# EAGLE board PCB (EAGLE 9.7.0)
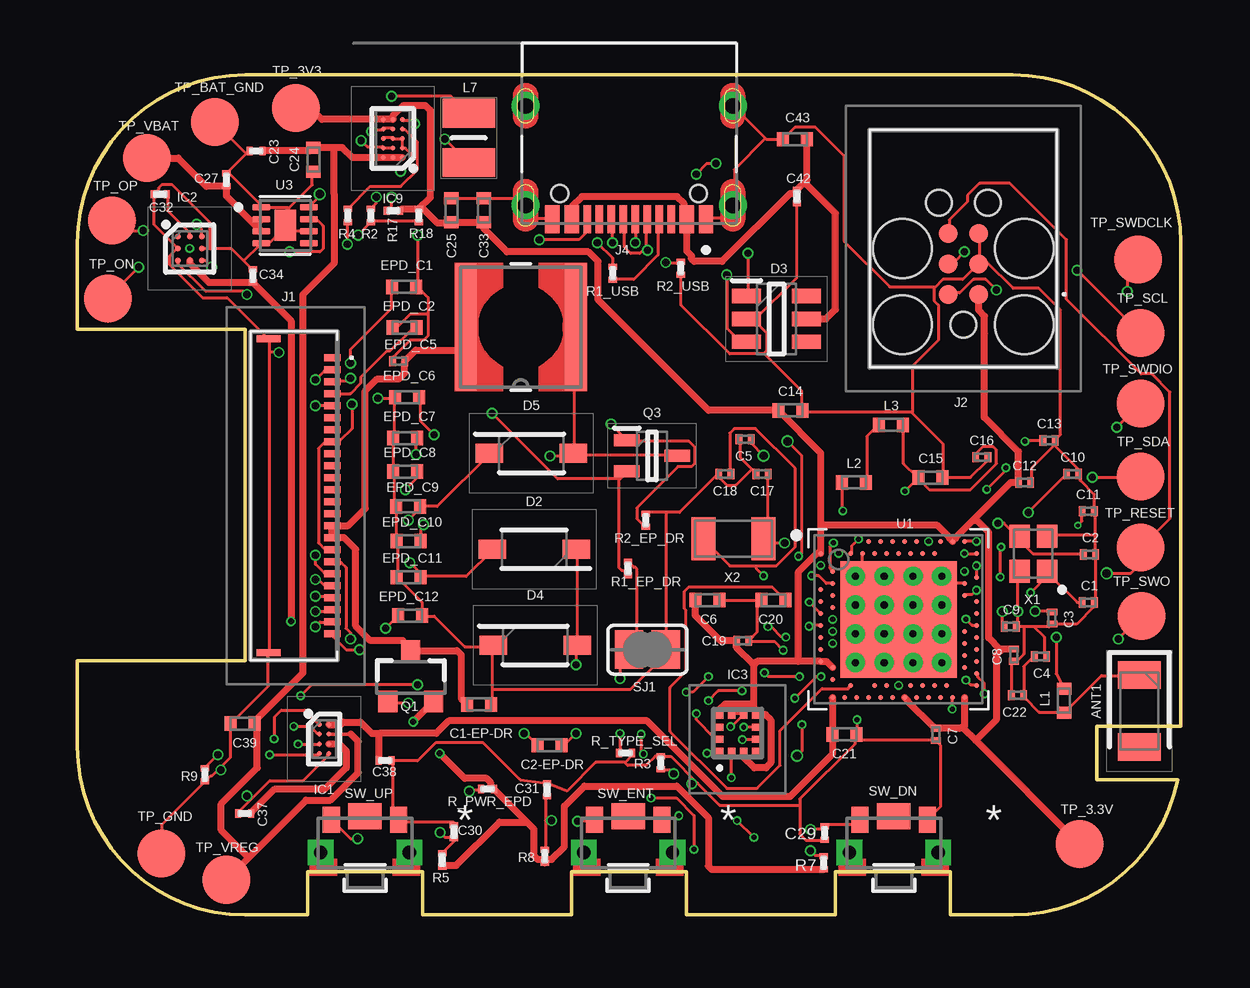
[diagram p0: board, top side]
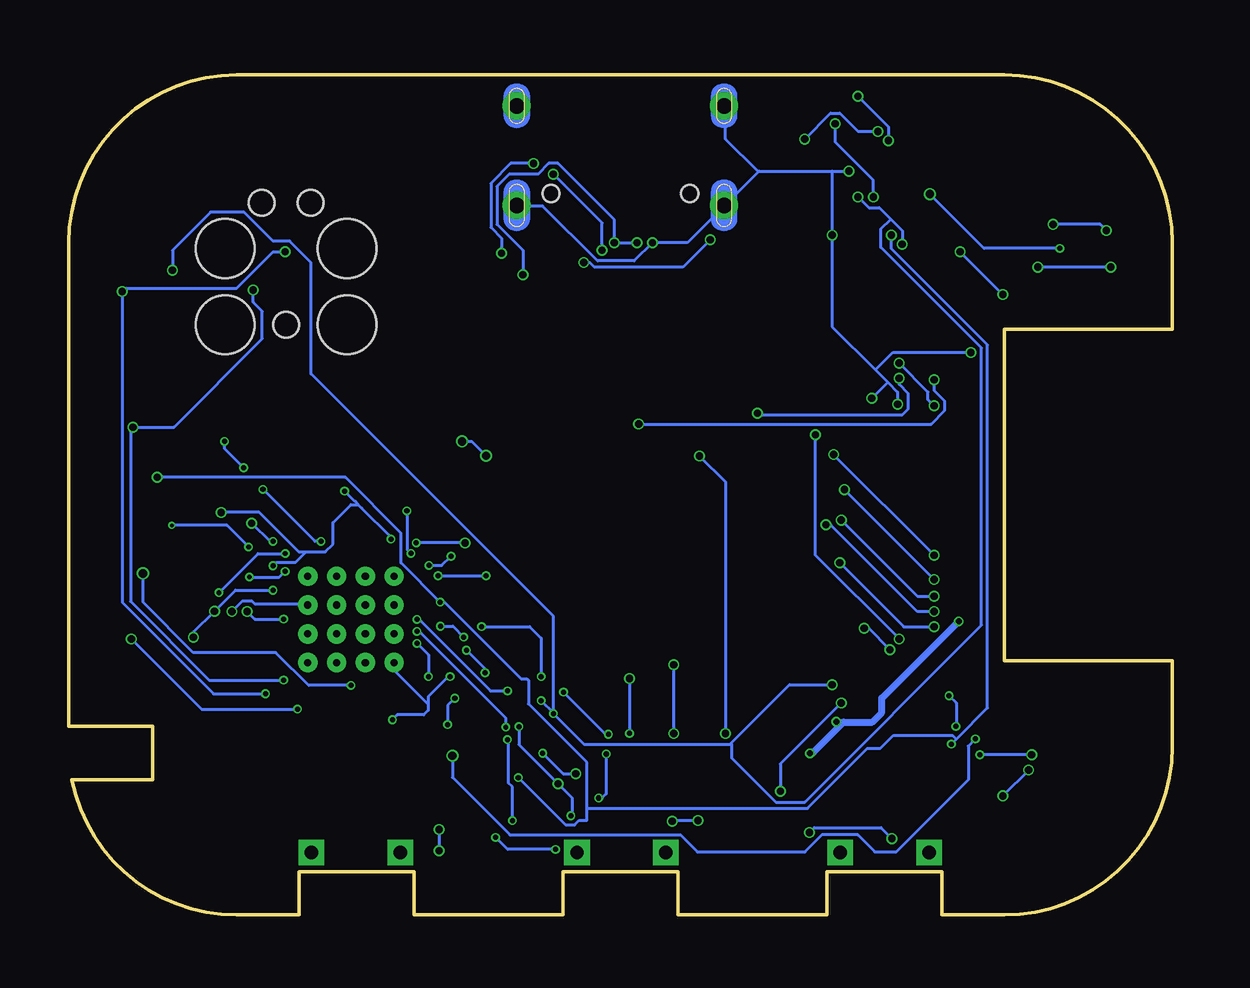
[diagram p1: board, bottom side, seen from below]

Size 46 x 35 mm. Coordinates in mm from the lower left corner, seen from the top.
Outline: 39,0 36.4,0 36.4,1.8 31.6,1.8 31.6,0 25.4,0 25.4,1.8 20.6,1.8 20.6,0 14.4,0 14.4,1.8 9.6,1.8 9.6,0 7,0 arc-90 0,7 0,10.6 7,10.6 7,24.4 0,24.4 0,28 arc-90 7,35 39,35 arc-90 46,28 46,7.85 42.5,7.85 42.5,5.63 45.86,5.63 arc-79 39,0
Copper layers (1*16): Top 0.035mm / dielectric 1.6mm / Bottom 0.035mm
Design rules "jlcpcb-2layers.dru *": minimum track width 5mil, minimum drill 0.15mm, track to track 5mil, track to pad 5mil, pad to pad 5mil, via to via 5mil, smd to smd 5mil, copper to edge 0.2mm, drill to drill 6mil, minimum pad ring 10mil, minimum via ring 3mil, stop-mask expansion 4mil, vias tented up to drill 0mil, thermal gap 10mil
Net classes: 0 default: width 0.15 mm; 1 power: width 0.3 mm

## Footprints (pad centres in the part's own frame; a part is rotated, then mirrored left to right if it is on the bottom)
2450AT18B100E_ANTC3216X140N = smd 1.15 x 1.8: 1 -1.5,0; 2 1.5,0
NORDIC_NRF_3_RESC0201_L = smd 0.28 x 0.43: 1 -0.255,0; 2 0.255,0
NORDIC_NRF_3_RESC0402_L = smd 0.5 x 0.6: 1 -0.5,0; 2 0.5,0
GRM011R60J152KE01L_1_0201 = smd 0.35 x 0.25: 1 0,0.275; 2 0,-0.275
ESP32_C6_LIBRARY_5_SOD3716X135N = smd 1.15 x 0.8: 1 -1.75,0; 2 1.75,0
ESP32_C6_LIBRARY_3_SOT95P280X145-6N = smd 1.2 x 0.6: 1 -1.25,0.95; 2 -1.25,0; 3 -1.25,-0.95; 4 1.25,-0.95; 5 1.25,0; 6 1.25,0.95
BQ25180YBGR_BGA8C40P2X4_100X155X50 = smd 0.2 x 0.2: A1 -0.2,0.6; A2 0.2,0.6; B1 -0.2,0.2; B2 0.2,0.2; C1 -0.2,-0.2; C2 0.2,-0.2; D1 -0.2,-0.6; D2 0.2,-0.6
DRV2605YZFR_BGA9C50P3X3_144X144X62 = smd 0.25 x 0.25: A1 -0.5,0.5; A2 0,0.5; A3 0.5,0.5; B1 -0.5,0; B2 0,0; B3 0.5,0; C1 -0.5,-0.5; C2 0,-0.5; C3 0.5,-0.5
BMA423_BMA423 = smd 0.3 x 0.35: 1 -0.75,-0.775; 2 -0.25,-0.775; 3 0.25,-0.775; 4 0.75,-0.775; 7 0.75,0.775; 8 0.25,0.775; 9 -0.25,0.775; 10 -0.75,0.775 | smd 0.35 x 0.3: 5 0.775,-0.25; 6 0.775,0.25; 11 -0.775,0.25; 12 -0.775,-0.25
RT6160AWSC_BGA15C40P3X5_140X230X60 = smd 0.216 x 0.216: A1 -0.4,0.8; A2 0,0.8; A3 0.4,0.8; B1 -0.4,0.4; B2 0,0.4; B3 0.4,0.4; C1 -0.4,0; C2 0,0; C3 0.4,0; D1 -0.4,-0.4; D2 0,-0.4; D3 0.4,-0.4; E1 -0.4,-0.8; E2 0,-0.8; E3 0.4,-0.8
503480-2400_5034802400 = smd 0.3 x 0.7: 1 -5.75,1.525; 2 -5.25,1.525; 3 -4.75,1.525; 4 -4.25,1.525; 5 -3.75,1.525; 6 -3.25,1.525; 7 -2.75,1.525; 8 -2.25,1.525; 9 -1.75,1.525; 10 -1.25,1.525; 11 -0.75,1.525; 12 -0.25,1.525; 13 0.25,1.525; 14 0.75,1.525; 15 1.25,1.525; 16 1.75,1.525; 17 2.25,1.525; 18 2.75,1.525; 19 3.25,1.525; 20 3.75,1.525; 21 4.25,1.525; 22 4.75,1.525; 23 5.25,1.525; 24 5.75,1.525 | smd 0.3 x 1: MP1 -6.54,-1.125; MP2 6.54,-1.125
TC2030-IDC_TC2030IDC = smd 0.783 x 0.783: 1 -0.953,-0.635; 2 -0.953,0.635; 3 0.317,-0.635; 4 0.317,0.635; 5 1.588,-0.635; 6 1.588,0.635 | hole 2.451: -2.223,-2.54; -2.223,2.54; 0.952,-2.54; 0.952,2.54 | hole 1.067: -2.223,0; 2.857,-1.016; 2.857,1.016
KH-TYPE-C-16P_KINGHELM_KH-TYPE-C-16P = smd 0.6 x 1.15: A1_B12 -3.2,4.725; A4_B9 -2.4,4.725; A9_B4 2.4,4.725; A12_B1 3.2,4.725 | smd 0.3 x 1.15: A5 -1.25,4.725; A6 -0.25,4.725; A7 0.25,4.725; A8 1.25,4.725; B5 1.75,4.725; B6 0.75,4.725; B7 -0.75,4.725; B8 -1.75,4.725 | drill 0.65 pad 1.05: SH1 -4.32,0; SH2 4.32,0; SH3 -4.32,4.15; SH4 4.32,4.15 | hole 0.7: -2.89,3.65; 2.89,3.65
NORDIC_NRF_2_RESC0402_L = smd 0.5 x 0.6: 1 -0.5,0; 2 0.5,0
ESP32_C6_LIBRARY_2_IND_4828-WE-TPC_WRE = smd 0.9 x 5.3: 1 -2.286,0; 2 2.286,0
MLP2016SR47MT0S1_INDC2016X100N = smd 1.2 x 2.2: 1 -1.028,0; 2 1.028,0
ESP32_C6_LIBRARY_4_ESP32_C6_LIBRARY_4_ESP32_C6_LIBRARY_4_ESP32_C6_LIBRARY_4_ESP32_WROVER_SPARKFUN-DISCRETESEMI_SOT23-3 = smd 0.8 x 0.9: 1 -0.95,-1; 2 0.95,-1; 3 0,1.1
ESP32_C6_LIBRARY_6_SOT65P210X110-3N = smd 1.05 x 0.5: 1 -1.05,0.65; 2 -1.05,-0.65; 3 1.05,0
ERA-1AEB3401C_0201 = smd 0.35 x 0.25: 1 0,0.275; 2 0,-0.275
ESP32_C6_LIBRARY_7_JUMPER_SJ = smd 1.168 x 1.6: 1 -0.762,0; 2 0.762,0
2025-10-22_07-23-44_LIBRARY_SW_EVP-AKE31A_PAN = smd 0.711 x 1.092: 1 -1.4,-0.972; 2 1.4,-0.972 | drill 0.559 pad 0.914 square: 3 -1.848,0.381; 4 1.848,0.381 | smd 1.397 x 1.092: 5 0,-1.124
HECTOR_WATCH_1_TP20R = smd 2 x 2: TP 0,0
NORDIC_NRF_4_AQFN50P700X700X85_HS-74N = smd 4.85 x 4.85: P$74 0,0 | drill 0.3 pad 0.6: P$75 -1.8,1.8; P$76 -0.6,1.8; P$77 0.6,1.8; P$78 1.8,1.8; P$79 -1.8,0.6; P$80 -0.6,0.6; P$81 0.6,0.6; P$82 1.8,0.6; P$83 -1.8,-0.6; P$84 -0.6,-0.6; P$85 0.6,-0.6; P$86 1.8,-0.6; P$87 -1.8,-1.8; P$88 -0.6,-1.8; P$89 0.6,-1.8; P$90 1.8,-1.8 | smd 0.2 x 0.2: P$A8 -1.25,3.25; P$A10 -0.75,3.25; P$A12 -0.25,3.25; P$A14 0.25,3.25; P$A16 0.75,3.25; P$A18 1.25,3.25; P$A20 1.75,3.25; P$A22 2.25,3.25; P$A23 2.75,3.25; P$AA24 3.25,-2.25; P$AB2 -2.75,-2.5; P$AC5 -2,-2.75; P$AC9 -1,-2.75; P$AC11 -0.5,-2.75; P$AC13 0,-2.75; P$AC15 0.5,-2.75; P$AC17 1,-2.75; P$AC19 1.5,-2.75; P$AC21 2,-2.75; P$AC24 3.25,-2.75; P$AD2 -2.75,-3.25; P$AD4 -2.25,-3.25; P$AD6 -1.75,-3.25; P$AD8 -1.25,-3.25; P$AD10 -0.75,-3.25; P$AD12 -0.25,-3.25; P$AD14 0.25,-3.25; P$AD16 0.75,-3.25; P$AD18 1.25,-3.25; P$AD20 1.75,-3.25; P$AD22 2.25,-3.25; P$AD23 2.75,-3.25; P$B1 -3.25,2.75; P$B3 -2.5,2.75; P$B5 -2,2.75; P$B7 -1.5,2.75; P$B9 -1,2.75; P$B11 -0.5,2.75; P$B13 0,2.75; P$B15 0.5,2.75; P$B17 1,2.75; P$B19 1.5,2.75; P$B24 3.25,2.75; P$C1 -3.25,2.25; P$D2 -2.75,2; P$D23 2.75,2; P$E24 3.25,1.75; P$F2 -2.75,1.5; P$F23 2.75,1.5; P$G1 -3.25,1.25; P$H2 -2.75,1; P$H23 2.75,1; P$J1 -3.25,0.75; P$J24 3.25,0.75; P$K2 -2.75,0.5; P$L1 -3.25,0.25; P$L24 3.25,0.25; P$M2 -2.75,0; P$N1 -3.25,-0.25; P$N24 3.25,-0.25; P$P2 -2.75,-0.5; P$P23 2.75,-0.5; P$R1 -3.25,-0.75; P$R24 3.25,-0.75; P$T2 -2.75,-1; P$T23 2.75,-1; P$U1 -3.25,-1.25; P$U24 3.25,-1.25; P$V23 2.75,-1.5; P$W1 -3.25,-1.75; P$W24 3.25,-1.75; P$Y2 -2.75,-2; P$Y23 2.75,-2
ESP32_C6_LIBRARY_SON50P200X200X80-9N = smd 0.76 x 0.27: 1 -0.985,0.75; 2 -0.985,0.25; 3 -0.985,-0.25; 4 -0.985,-0.75; 5 0.985,-0.75; 6 0.985,-0.25; 7 0.985,0.25; 8 0.985,0.75 | smd 0.9 x 1.3: 9 0,0
NORDIC_NRF_BT-XTAL_2016_N = smd 0.95 x 0.85: 1 -0.725,-0.575; 2 0.725,-0.575; 3 0.725,0.575; 4 -0.725,0.575
NORDIC_NRF_1_XTAL_3215_N = smd 1 x 1.8: 1 -1.25,0; 2 1.25,0

## Placement (x,y rotation side)
ANT1  2450AT18B100E  [2450AT18B100E_ANTC3216X140N]  44.27,8.5 270 top
C1  12pF  [NORDIC_NRF_3_RESC0201_L]  42.13,13.02 0 top
C1-EP-DR  10uF  [NORDIC_NRF_3_RESC0402_L]  16.74,8.77 180 top
C2  12pF  [NORDIC_NRF_3_RESC0201_L]  42.18,15.02 0 top
C2-EP-DR  4.7uF/25V  [NORDIC_NRF_3_RESC0402_L]  19.68,7.07 0 top
C3  1pF  [NORDIC_NRF_3_RESC0201_L]  40.62,12.37 270 top
C4  1pF  [NORDIC_NRF_3_RESC0201_L]  40.14,10.77 0 top
C5  100nF  [NORDIC_NRF_3_RESC0201_L]  27.83,19.82 180 top
C6  4.7uF  [NORDIC_NRF_3_RESC0402_L]  26.26,13.12 0 top
C7  100nF  [NORDIC_NRF_3_RESC0201_L]  35.78,7.52 270 top
C8  100nF  [NORDIC_NRF_3_RESC0201_L]  39.03,10.82 270 top
C9  820pF  [NORDIC_NRF_3_RESC0201_L]  38.88,12.02 0 top
C10  N.C.  [NORDIC_NRF_3_RESC0201_L]  41.48,18.37 0 top
C11  100pF  [NORDIC_NRF_3_RESC0201_L]  42.13,16.82 0 top
C12  100nF  [NORDIC_NRF_3_RESC0201_L]  39.48,18.02 0 top
C13  N.C.  [NORDIC_NRF_3_RESC0201_L]  40.5,19.77 0 top
C14  4.7uF  [NORDIC_NRF_3_RESC0402_L]  29.71,21.02 0 top
C15  1.0uF  [NORDIC_NRF_3_RESC0402_L]  35.56,18.22 0 top
C16  47nF  [NORDIC_NRF_3_RESC0201_L]  37.69,19.07 0 top
C17  12pF  [NORDIC_NRF_3_RESC0201_L]  28.54,18.37 0 top
C18  12pF  [NORDIC_NRF_3_RESC0201_L]  26.99,18.37 0 top
C19  100nF  [NORDIC_NRF_3_RESC0201_L]  27.73,11.42 0 top
C20  4.7uF  [NORDIC_NRF_3_RESC0402_L]  29.01,13.12 180 top
C21  4.7uF  [NORDIC_NRF_3_RESC0402_L]  31.96,7.52 0 top
C22  N.C.  [NORDIC_NRF_3_RESC0201_L]  39.18,9.15 180 top
C23  0.1uF  [GRM011R60J152KE01L_1_0201]  7.45,31.83 90 top
C24  10uF  [NORDIC_NRF_3_RESC0402_L]  9.84,31.47 90.2 top
C25  22uF  [NORDIC_NRF_3_RESC0402_L]  15.59,29.37 90 top
C27  0.1uF  [GRM011R60J152KE01L_1_0201]  6.21,30.63 0 top
C29  1uF  [GRM011R60J152KE01L_1_0201]  31.15,3.42 180 top
C30  1uF  [GRM011R60J152KE01L_1_0201]  15.7,3.47 0 top
C31  1uF  [GRM011R60J152KE01L_1_0201]  19.58,5.22 0 top
C32  1uF  [GRM011R60J152KE01L_1_0201]  3.45,30.03 90 top
C33  22uF  [NORDIC_NRF_3_RESC0402_L]  16.94,29.37 90 top
C34  0.1uF  [GRM011R60J152KE01L_1_0201]  7.31,26.63 0 top
C37  1uF  [GRM011R60J152KE01L_1_0201]  6.97,4.23 90 top
C38  1uF  [GRM011R60J152KE01L_1_0201]  12.83,6.43 270 top
C39  10uF  [NORDIC_NRF_3_RESC0402_L]  6.89,7.97 180 top
C42  0.1uF  [GRM011R60J152KE01L_1_0201]  29.99,29.93 0 top
C43  4.7uF  [NORDIC_NRF_3_RESC0402_L]  29.91,32.32 0 top
D2  MBR0530  [ESP32_C6_LIBRARY_5_SOD3716X135N]  19.04,15.23 180 top
D3  USBLC6-2SC6Y  [ESP32_C6_LIBRARY_3_SOT95P280X145-6N]  29.14,24.83 0 top
D4  MBR0530  [ESP32_C6_LIBRARY_5_SOD3716X135N]  19.08,11.23 0 top
D5  MBR0530  [ESP32_C6_LIBRARY_5_SOD3716X135N]  18.92,19.23 0 top
EPD_C1  1uF/50V  [NORDIC_NRF_3_RESC0402_L]  13.62,26.17 180 top
EPD_C2  1uF/50V  [NORDIC_NRF_3_RESC0402_L]  13.63,24.47 0 top
EPD_C5  0.1uF/50V  [NORDIC_NRF_3_RESC0201_L]  13.39,23.07 0 top
EPD_C6  1uF/50V  [NORDIC_NRF_3_RESC0402_L]  13.74,21.57 0 top
EPD_C7  1uF/50V  [NORDIC_NRF_3_RESC0402_L]  13.65,19.87 0 top
EPD_C8  1uF/50V  [NORDIC_NRF_3_RESC0402_L]  13.66,18.47 0 top
EPD_C9  1uF/50V  [NORDIC_NRF_3_RESC0402_L]  13.78,17.02 0 top
EPD_C10  1uF/50V  [NORDIC_NRF_3_RESC0402_L]  13.8,15.57 0 top
EPD_C11  1uF/50V  [NORDIC_NRF_3_RESC0402_L]  13.81,14.07 0 top
EPD_C12  1uF/50V  [NORDIC_NRF_3_RESC0402_L]  13.87,12.47 180 top
IC1  BQ25180YBGR  [BQ25180YBGR_BGA8C40P2X4_100X155X50]  10.28,7.33 0 top
IC2  DRV2605YZFR  [DRV2605YZFR_BGA9C50P3X3_144X144X62]  4.68,27.77 0 top
IC3  BMA421  [BMA423_BMA423]  27.52,7.57 0 top
IC9  RT6160AWSC  [RT6160AWSC_BGA15C40P3X5_140X230X60]  13.15,32.35 180 top
J1  503480-2400  [503480-2400_5034802400]  9.11,17.47 270 top
J2  TC2030-IDC  [TC2030-IDC_TC2030IDC]  36.93,26.81 90 top
J4  KH-TYPE-C-16P  [KH-TYPE-C-16P_KINGHELM_KH-TYPE-C-16P]  23,33.71 180 top
L1  3.9nH  [NORDIC_NRF_2_RESC0402_L]  41.13,8.92 270 top
L2  10μH  [NORDIC_NRF_2_RESC0402_L]  32.36,18.02 0 top
L3  15nH  [NORDIC_NRF_2_RESC0402_L]  33.91,20.42 0 top
L5  68uH  [ESP32_C6_LIBRARY_2_IND_4828-WE-TPC_WRE]  18.48,24.5 180 top
L7  FTC252012SR47MBCA  [MLP2016SR47MT0S1_INDC2016X100N]  16.31,32.38 270 top
Q1  20V/4.2A/52mΩ/1.4W  [ESP32_C6_LIBRARY_4_ESP32_C6_LIBRARY_4_ESP32_C6_LIBRARY_4_ESP32_C6_LIBRARY_4_ESP32_WROVER_SPARKFUN-DISCRETESEMI_SOT23-3]  13.9,9.9 0 top
Q3  SI1308EDL-T1-GE3  [ESP32_C6_LIBRARY_6_SOT65P210X110-3N]  23.95,19.13 0 top
R1_EP_DR  0.47  [ERA-1AEB3401C_0201]  22.95,14.43 0 top
R1_USB  5K1  [ERA-1AEB3401C_0201]  22.31,26.73 0 top
R2  0  [ERA-1AEB3401C_0201]  12.23,29.14 180 top
R2_EP_DR  10K  [ERA-1AEB3401C_0201]  23.69,16.44 0 top
R2_USB  5K1  [ERA-1AEB3401C_0201]  25.15,26.94 0 top
R3  0  [ERA-1AEB3401C_0201]  24.31,6.34 0 top
R4  0  [ERA-1AEB3401C_0201]  11.27,29.14 180 top
R5  10K  [ERA-1AEB3401C_0201]  15.21,2.29 0 top
R7  10K  [ERA-1AEB3401C_0201]  31.11,2.18 0 top
R8  10K  [ERA-1AEB3401C_0201]  19.48,2.44 0 top
R9  10K  [ERA-1AEB3401C_0201]  5.31,5.84 180 top
R17  3K3  [ERA-1AEB3401C_0201]  13.17,29.34 270 top
R18  3K3  [ERA-1AEB3401C_0201]  14.23,29.14 0 top
R_PWR_EPD  10K  [ERA-1AEB3401C_0201]  17.09,5.24 90 top
R_TYPE_SEL  2.2  [ERA-1AEB3401C_0201]  22.85,6.74 270 top
SJ1  [ESP32_C6_LIBRARY_7_JUMPER_SJ]  23.76,11.05 180 top
SW_DN  2025-10-22_07-23-44_LIBRARY_EVP-AKE31ASW_EVP-AKE31A_PAN  [2025-10-22_07-23-44_LIBRARY_SW_EVP-AKE31A_PAN]  34.03,2.99 180 top
SW_ENT  2025-10-22_07-23-44_LIBRARY_EVP-AKE31ASW_EVP-AKE31A_PAN  [2025-10-22_07-23-44_LIBRARY_SW_EVP-AKE31A_PAN]  22.96,2.99 180 top
SW_UP  2025-10-22_07-23-44_LIBRARY_EVP-AKE31ASW_EVP-AKE31A_PAN  [2025-10-22_07-23-44_LIBRARY_SW_EVP-AKE31A_PAN]  11.99,2.99 180 top
TP_3.3V  HECTOR_WATCH_1_TPTP20R  [HECTOR_WATCH_1_TP20R]  41.78,2.95 0 top
TP_3V3  HECTOR_WATCH_1_TPTP20R  [HECTOR_WATCH_1_TP20R]  9.11,33.62 0 top
TP_BAT_GND  HECTOR_WATCH_1_TPTP20R  [HECTOR_WATCH_1_TP20R]  5.74,33.04 0 top
TP_GND  HECTOR_WATCH_1_TPTP20R  [HECTOR_WATCH_1_TP20R]  3.5,2.56 0 top
TP_ON  HECTOR_WATCH_1_TPTP20R  [HECTOR_WATCH_1_TP20R]  1.28,25.68 0 top
TP_OP  HECTOR_WATCH_1_TPTP20R  [HECTOR_WATCH_1_TP20R]  1.45,28.93 0 top
TP_RESET  HECTOR_WATCH_1_TPTP20R  [HECTOR_WATCH_1_TP20R]  44.32,15.3 0 top
TP_SCL  HECTOR_WATCH_1_TPTP20R  [HECTOR_WATCH_1_TP20R]  44.32,24.25 0 top
TP_SDA  HECTOR_WATCH_1_TPTP20R  [HECTOR_WATCH_1_TP20R]  44.32,18.28 0 top
TP_SWDCLK  HECTOR_WATCH_1_TPTP20R  [HECTOR_WATCH_1_TP20R]  44.21,27.3 0 top
TP_SWDIO  HECTOR_WATCH_1_TPTP20R  [HECTOR_WATCH_1_TP20R]  44.32,21.3 0 top
TP_SWO  HECTOR_WATCH_1_TPTP20R  [HECTOR_WATCH_1_TP20R]  44.36,12.45 0 top
TP_VBAT  HECTOR_WATCH_1_TPTP20R  [HECTOR_WATCH_1_TP20R]  2.91,31.53 0 top
TP_VREG  HECTOR_WATCH_1_TPTP20R  [HECTOR_WATCH_1_TP20R]  6.22,1.47 0 top
U1  NRF52840_QF  [NORDIC_NRF_4_AQFN50P700X700X85_HS-74N]  34.23,12.31 0 top
U3  MAX17048G+T10  [ESP32_C6_LIBRARY_SON50P200X200X80-9N]  8.66,28.74 0 top
X1  32MHz  [NORDIC_NRF_BT-XTAL_2016_N]  39.85,15.05 90 top
X2  32.768kHz  [NORDIC_NRF_1_XTAL_3215_N]  27.34,15.67 180 top

## Library data of the parts
ANT1 = InkTime_v5; ARROW_PART_NUMBER: 2450AT18B100E; ARROW_PRICE-STOCK: https://www.arrow.com/en/products/2450at18b100e/johanson-dielectrics?utm_currency=USD&region=nac; DESCRIPTION: Antennas 2.45GHz ANTENNA; HEIGHT: 1.4mm; MANUFACTURER_NAME: JOHANSON TECHNOLOGY; MANUFACTURER_PART_NUMBER: 2450AT18B100E; MOUSER_PART_NUMBER: 609-2450AT18B100E; MOUSER_PRICE-STOCK: https://www.mouser.co.uk/ProductDetail/Johanson-Technology/2450AT18B100E?qs=yCnrNFeXz%252Bh5MFsFIXGZGA%3D%3D
C1 C1-EP-DR C2 C2-EP-DR C3-C25 C27 C29-C34 C37-C39 C42 C43 EPD_C1 EPD_C2 EPD_C5-EPD_C12 L1-L3 R1_EP_DR R1_USB R2 R2_EP_DR R2_USB R3-R5 R7-R9 R17 R18 R_PWR_EPD R_TYPE_SEL SJ1 TP_3.3V TP_3V3 TP_BAT_GND TP_GND TP_ON TP_OP TP_RESET TP_SCL TP_SDA TP_SWDCLK TP_SWDIO TP_SWO TP_VBAT TP_VREG U1 X1 X2 = InkTime_v5
D2 D4 D5 = InkTime_v5; AVAILABILITY: In Stock; CHECK_PRICES: https://www.snapeda.com/parts/MBR0530/Onsemi/view-part/?ref=eda; DESCRIPTION: Diode Schottky 30 V 500mA Surface Mount SOD-123; MF: ON Semiconductor; MP: MBR0530; PACKAGE: SOD-123-2 ON Semiconductor; PRICE: None; PURCHASE-URL: https://www.snapeda.com/api/url_track_click_mouser/?unipart_id=179458&manufacturer=ON Semiconductor&part_name=MBR0530&search_term=None; SNAPEDA_LINK: https://www.snapeda.com/parts/MBR0530/Onsemi/view-part/?ref=snap
D3 = InkTime_v5; AVAILABILITY: In Stock; CHECK_PRICES: https://www.snapeda.com/parts/USBLC6-2SC6Y/STMicroelectronics/view-part/?ref=eda; DESCRIPTION: 17V Clamp 5A (8/20µs) Ipp Tvs Diode Surface Mount SOT-23-6; MF: STMicroelectronics; MP: USBLC6-2SC6Y; PACKAGE: SOT-23-6 STMicroelectronics; PRICE: None; SNAPEDA_LINK: https://www.snapeda.com/parts/USBLC6-2SC6Y/STMicroelectronics/view-part/?ref=snap
IC1 = InkTime_v5; ARROW_PART_NUMBER: BQ25180YBGR; ARROW_PRICE-STOCK: https://www.arrow.com/en/products/bq25180ybgr/texas-instruments?utm_currency=USD&region=nac; DESCRIPTION: Charger IC Lithium Ion/Polymer, Lithium Iron Phosphate 8-DSBGA (1.6x1.1); HEIGHT: 0.5mm; MANUFACTURER_NAME: Texas Instruments; MANUFACTURER_PART_NUMBER: BQ25180YBGR; MOUSER_PART_NUMBER: 595-BQ25180YBGR; MOUSER_PRICE-STOCK: https://www.mouser.co.uk/ProductDetail/Texas-Instruments/BQ25180YBGR?qs=doiCPypUmgEWjAK%252BJAX6Tw%3D%3D
IC2 = InkTime_v5; ARROW_PART_NUMBER: DRV2605YZFR; ARROW_PRICE-STOCK: https://www.arrow.com/en/products/drv2605yzfr/texas-instruments?region=nac; DESCRIPTION: Haptic Driver for ERM/LRA with Built-In Library and Smart Loop Architecture; HEIGHT: 0.625mm; MANUFACTURER_NAME: Texas Instruments; MANUFACTURER_PART_NUMBER: DRV2605YZFR
IC3 = InkTime_v5; ARROW_PART_NUMBER: BMA423; ARROW_PRICE-STOCK: https://www.arrow.com/en/products/bma423/bosch; DESCRIPTION: Accelerometers Triaxial low-g 12bit Acceleration Sensor; HEIGHT: 1mm; MANUFACTURER_NAME: BOSCH; MANUFACTURER_PART_NUMBER: BMA423; MOUSER_PART_NUMBER: 262-BMA423; MOUSER_PRICE-STOCK: https://www.mouser.co.uk/ProductDetail/Bosch-Sensortec/BMA423?qs=HXFqYaX1Q2xC%252BSgeGoX3mg%3D%3D
IC9 = InkTime_v5; DESCRIPTION: Buck-Boost Regulator Positive Output Step-Up/Step-Down I2C DC-DC Controller IC 15-WL-CSP (BSC) (1.4x2.3); HEIGHT: 0.6mm; MANUFACTURER_NAME: RICHTEK; MANUFACTURER_PART_NUMBER: RT6160AWSC; MOUSER_PART_NUMBER: 835-RT6160AWSC; MOUSER_PRICE-STOCK: https://www.mouser.co.uk/ProductDetail/Richtek/RT6160AWSC?qs=amGC7iS6iy%2FLd9PSoixZXQ%3D%3D
J1 = InkTime_v5; DESCRIPTION: FFC & FPC Connectors 0.5mm FPC RA SMT Dual Contact 24Ckt; HEIGHT: 1.87mm; MANUFACTURER_NAME: Molex; MANUFACTURER_PART_NUMBER: 503480-2400; MOUSER_PART_NUMBER: 538-503480-2400; MOUSER_PRICE-STOCK: https://www.mouser.co.uk/ProductDetail/Molex/503480-2400?qs=OAhjpuo3Vu7efIoxFh9AOw%3D%3D
J2 = InkTime_v5; DESCRIPTION: CABLE ADAPTER 6 POS; HEIGHT: 19mm; MANUFACTURER_NAME: Tag Connect; MANUFACTURER_PART_NUMBER: TC2030-IDC
J4 = InkTime_v5; AVAILABILITY: Not in stock; CHECK_PRICES: https://www.snapeda.com/parts/KH-TYPE-C-16P/Kinghelm/view-part/?ref=eda; MF: kinghelm; MP: KH-TYPE-C-16P; PACKAGE: None; PRICE: None; SNAPEDA_LINK: https://www.snapeda.com/parts/KH-TYPE-C-16P/Kinghelm/view-part/?ref=snap
L5 = InkTime_v5; COPYRIGHT: Copyright (C) 2024 Ultra Librarian. All rights reserved.; MANUFACTURER_PART_NUMBER: 744043680; MFR_NAME: Wurth Electronics
L7 = InkTime_v5; DESCRIPTION: SMD / SMT Inductors (Coils), L=0.47?H, L x W x T :; HEIGHT: 1mm; JLCPCB: https://jlcpcb.com/partdetail/6763488-FTC252012SR47MBCA/C5832368; MANUFACTURER_NAME: TDK; MANUFACTURER_PART_NUMBER: FTC252012SR47MBCA
Q1 = InkTime_v5; PROD_ID: TRAN-14388
Q3 = InkTime_v5; AVAILABILITY: In Stock; CHECK_PRICES: https://www.snapeda.com/parts/SI1308EDL-T1-GE3/Vishay+Siliconix/view-part/?ref=eda; DESCRIPTION: Si1308EDL-T1-GE3 N-channel MOSFET Transistor, 1.5 A, 30 V, 3-Pin SC-70 | Siliconix / Vishay SI1308EDL-T1-GE3; MF: Vishay Siliconix; MP: SI1308EDL-T1-GE3; PACKAGE: SOT-323 Vishay Semiconductor; PRICE: None; PURCHASE-URL: https://www.snapeda.com/api/url_track_click_mouser/?unipart_id=274603&manufacturer=Vishay Siliconix&part_name=SI1308EDL-T1-GE3&search_term=None; SNAPEDA_LINK: https://www.snapeda.com/parts/SI1308EDL-T1-GE3/Vishay+Siliconix/view-part/?ref=snap
SW_DN SW_ENT SW_UP = InkTime_v5; COPYRIGHT: Copyright (C) 2025 Ultra Librarian. All rights reserved.; DIGI-KEY_PART_NUMBER_1: P123437TR-ND; DIGI-KEY_PART_NUMBER_2: P123437CT-ND; DIGI-KEY_PART_NUMBER_3: P123437DKR-ND; MANUFACTURER_NAME: Panasonic; MANUFACTURER_PART_NUMBER: EVP-AKE31A
U3 = InkTime_v5; AVAILABILITY: In Stock; CHECK_PRICES: https://www.snapeda.com/parts/MAX17048G+T10/Analog+Devices/view-part/?ref=eda; DESCRIPTION: 3µA 1-Cell/2-Cell Fuel Gauge with ModelGauge; MF: Analog Devices; MP: MAX17048G+T10; PACKAGE: TDFN-8 Maxim; PRICE: None; PURCHASE-URL: https://www.snapeda.com/api/url_track_click_mouser/?unipart_id=329239&manufacturer=Analog Devices&part_name=MAX17048G+T10&search_term=None; SNAPEDA_LINK: https://www.snapeda.com/parts/MAX17048G+T10/Analog+Devices/view-part/?ref=snap

## Nets
3V3/1.7D [power]: C34.2 IC2.C2 Q1.2 R5.2 R7.2 R8.2 R_PWR_EPD.2
3V3/2.4A [power]: C6.1 C7.1 C8.1 C12.1 C14.1 C19.1 C25.1 C33.1 IC3.3 IC3.7 IC3.10 IC9.E2 IC9.E3 J2.1 R17.1 R18.1 TP_3.3V.TP TP_3V3.TP U1.P$A22 U1.P$AD14 U1.P$AD23 U1.P$B1 U1.P$W1 U1.P$Y2
ALERT/1.6C: U3.5
ALERT/2.5C: U1.P$J24
D+/1.5D: D3.4
D+/2.7D: U1.P$AD6
D-/1.5D: D3.6
D-/2.7D: U1.P$AD4
DEC1: C5.1 U1.P$C1
DEC3: C11.1 U1.P$D23
DEC4_6: C10.1 C15.1 C16.1 L3.2 U1.P$B5 U1.P$E24
DN: D3.1 J4.A7 J4.B7
DP: D3.3 J4.A6 J4.B6
EPD_3V3 [power]: C1-EP-DR.2 EPD_C5.2 J1.15 J1.16 L5.2 Q1.3
EPD_BUSY/1.5D: J1.9
EPD_BUSY/2.2D: U1.P$AD12
EPD_CS/1.4C: J1.12
EPD_CS/2.2D: U1.P$K2
EPD_DC/1.5D: J1.11
EPD_DC/2.2D: U1.P$AD10
EPD_RST/1.5D: J1.10
EPD_RST/2.2D: U1.P$AC11
GDR: J1.2 Q3.1 R2_EP_DR.2
GND: C1-EP-DR.1 C1.2 C2.2 C3.2 C4.2 C5.2 C6.2 C7.2 C8.2 C9.2 C10.2 C11.2 C12.2 C13.2 C14.2 C15.2 C16.2 C17.1 C18.1 C19.2 C20.2 C21.2 C22.2 C23.1 C24.1 C25.2 C27.1 C29.1 C30.1 C31.1 C32.1 C33.2 C34.1 C37.1 C38.1 C39.2 C42.2 C43.1 D3.2 D4.1 EPD_C1.1 EPD_C2.1 EPD_C5.1 EPD_C6.1 EPD_C7.1 EPD_C8.1 EPD_C9.1 EPD_C10.1 EPD_C11.1 EPD_C12.1 IC1.D2 IC2.B1 IC2.B3 IC3.8 IC3.9 IC9.B1 IC9.C1 IC9.C2 IC9.C3 J1.8 J1.17 J1.MP1 J1.MP2 J2.3 J2.5 J4.A1_B12 J4.A12_B1 J4.SH1 J4.SH2 J4.SH3 J4.SH4 R1_USB.1 R2_EP_DR.1 R2_USB.2 R3.1 R9.1 R_TYPE_SEL.1 SJ1.1 SW_DN.1 SW_ENT.1 SW_UP.1 TP_BAT_GND.TP TP_GND.TP U1.P$74 U1.P$75 U1.P$76 U1.P$77 U1.P$78 U1.P$79 U1.P$80 U1.P$81 U1.P$82 U1.P$83 U1.P$84 U1.P$85 U1.P$86 U1.P$87 U1.P$88 U1.P$89 U1.P$90 U1.P$B7 U1.P$F23 U3.1 U3.4 U3.6 U3.9 X1.2 X1.4
HAPTIC_EN/1.4C: IC2.A1
HAPTIC_EN/2.6A: U1.P$U1
IMU_INT1: IC3.5 U1.P$N1
IMU_INT2: IC3.6 U1.P$P2
LX1: IC9.B2 IC9.B3 L7.1
LX2: IC9.D2 IC9.D3 L7.2
MOSI/1.5B: J1.14
MOSI/2.2D: U1.P$B13
N$1: C20.1 U1.P$AC5
N$2: L2.2 L3.1
N$3: L2.1 U1.P$B3
N$4: C1.1 U1.P$B24 X1.1
N$5: EPD_C12.2 J1.24
N$6: C2.1 U1.P$A23 X1.3
N$7: IC9.E1 R2.2
N$8: IC9.D1 R4.2
N$9: IC1.D1 R9.2
N$10: C13.1 U1.P$A18
N$11: C9.1 U1.P$N24
N$12: IC3.1 R3.2
N$13: C32.2 IC2.A2
N$14: C3.1 L1.1 U1.P$H23
N$15: R1_EP_DR.1 R_TYPE_SEL.2 SJ1.2
N$16: EPD_C10.2 J1.22
N$17: EPD_C8.2 J1.20
N$18: EPD_C7.2 J1.19
N$19: EPD_C6.2 J1.18
N$20: C2-EP-DR.1 D5.2 L5.1 Q3.3
N$21: C2-EP-DR.2 D2.1 D4.2
N$22: J4.B5 R2_USB.1
N$26: EPD_C2.2 J1.4
N$27: EPD_C1.2 J1.5
N$29: J4.A5 R1_USB.2
OUT+: IC2.A3 TP_OP.TP
OUT-: IC2.C3 TP_ON.TP
P0.00/XL1: C17.2 U1.P$D2 X2.1
P0.01/XL2: C18.2 U1.P$F2 X2.2
P0.04: U1.P$J1
P0.09: U1.P$L24
P0.13/1.5D: C30.2 R5.1 SW_UP.2
P0.13/2.6C: U1.P$AD8
P0.14/1.5D: C31.2 R8.1 SW_ENT.2
P0.14/2.7C: U1.P$AC9
P0.19: U1.P$AC15
P0.20: U1.P$AD16
P0.21: U1.P$AC17
P0.22: U1.P$AD18
P0.23: U1.P$AC19
P0.24: U1.P$AD20
P0.25: U1.P$AC21
P0.26: U1.P$G1
P0.27: U1.P$H2
P0.28: U1.P$B11
P0.29: U1.P$A10
P0.30: U1.P$B9
P0.31: U1.P$A8
P1.01/1.6C: Q1.1 R_PWR_EPD.1
P1.01/2.4B: U1.P$Y23
P1.02/1.6C: C29.2 R7.1 SW_DN.2
P1.02/2.8C: U1.P$W24
P1.03: U1.P$V23
P1.04: U1.P$U24
P1.05: U1.P$T23
P1.06: U1.P$R24
P1.07: U1.P$P23
P1.09: U1.P$R1
P1.10: U1.P$A20
P1.11: U1.P$B19
P1.12: U1.P$B17
P1.13: U1.P$A16
P1.14: U1.P$B15
P1.15: U1.P$A14
PMIC_INT: IC1.A1 U1.P$T2
PREVGH: D5.1 EPD_C9.2 J1.21
PREVGL: D2.2 EPD_C11.2 J1.23
RESE: J1.3 Q3.2 R1_EP_DR.2
RESET: J2.6 TP_RESET.TP U1.P$AC13
RF: ANT1.1 C4.1 C22.1 L1.2
SCK/1.5B: J1.13
SCK/2.2D: U1.P$A12
SCL/1.4C: IC2.C1 U3.7
SCL/2.4C: IC1.B1 IC3.12 R4.1 R17.2 TP_SCL.TP U1.P$M2
SDA/1.4C: IC2.B2 U3.8
SDA/2.4C: IC1.C1 IC3.2 R2.1 R18.2 TP_SDA.TP U1.P$L1
SWDCLK: J2.4 TP_SWDCLK.TP U1.P$AA24
SWDIO: J2.2 TP_SWDIO.TP U1.P$AC24
SWO: TP_SWO.TP U1.P$AD22
VBAT/1.2A [power]: C27.2 TP_VBAT.TP U3.2 U3.3
VBAT/2.5C [power]: C37.2 IC1.C2
VBUS/1.5D [power]: C42.1 C43.2 D3.5 J4.A4_B9 J4.A9_B4
VBUS/2.6D [power]: C21.1 C38.2 IC1.A2 U1.P$AD2
VREG [power]: C23.2 C24.2 C39.1 IC1.B2 IC9.A1 IC9.A2 IC9.A3 TP_VREG.TP

## Tracks (layer width: path | path; a pad name or v marks a point on that pad's centre or on a via)
3V3/1.7D  (via drill 0.25 pad 0.14, 0.25 pad 0.15)
  Top 0.3: Q1.2 v14,8.05 | 18.74,3.87 R_PWR_EPD.2 17.22,5.39 17.22,5.53 17.06,5.69 16.14,5.69 v15.1,6.73 | R5.2 15.25,2.07 15.8,2.07 17.6,3.87 18.74,3.87 | 18.74,3.87 19.03,3.59 19.03,2.48 19.19,2.32 19.33,2.32 R8.2 19.63,2.32 19.77,2.32 20.3,2.85 20.3,4.53 21.14,5.37 24.99,5.37 26.3,4.05 26.3,2.03 26.43,1.9 R7.2 | IC2.C2 4.68,27.15 5.48,26.36 C34.2 8.9,24.77 v8.9,12.23
  Bottom 0.3: 13.7,8.03 15,6.73 v15.1,6.73 | 13.7,8.03 v14,8.03 v14,8.05 | 13.7,8.03 12.5,8.03 12.1,8.43 12.1,9.03 v8.9,12.23
3V3/2.4A
  Top 0.3: U1.P$AD23 36.98,7.85 | 36.98,7.85 36.78,7.78 C7.1 35.74,7.78 34.61,8.91 34.61,8.94 U1.P$AD14 | C6.1 25.76,12.47 26.81,11.42 C19.1 27.48,11.14 28.19,10.42 28.27,10.5 | TP_3.3V.TP 37.45,7.28 | 37.45,7.28 36.98,7.74 36.98,7.85 | J2.1 37.57,25.2 37.82,24.96 37.82,24.22 37.8,24.21 37.8,20.73 39.23,19.31 C12.1 38.91,18.02 37.31,16.42 | R17.1 13.52,29.42 R18.1 | R18.1 14.42,29.42 15,28.83 15.55,28.83 C25.1 C33.1 16.94,28.59 17.9,27.63 21.3,27.63 21.7,27.23 21.7,25.63 26.31,21.02 C14.1 30.98,19.25 30.98,18.93 30.98,16.23 | U1.P$Y2 31.23,10.56 U1.P$W1 30.04,10.56 | 30.04,10.56 28.33,10.56 28.27,10.5 | 28.27,10.5 28.18,10.41 28.18,8.66 | R18.1 14.7,29.89 14.7,33.53 14.5,33.73 13.59,33.73 13.17,33.31 13.17,33.17 IC9.E2 IC9.E3 10.18,33.15 9.8,33.53 9.67,33.6 9.16,33.6 TP_3V3.TP | 37.45,7.28 38.3,8.13 38.3,10.83 38.55,11.08 C8.1 38.46,11.08 37.99,11.54 37.99,15.94 37.51,16.42 37.31,16.42 | IC3.10 26.77,8.56 27.01,8.8 28.04,8.8 28.18,8.66 | IC3.3 27.77,6.58 28.22,6.13 28.7,6.13 28.9,6.33 28.9,8.13 28.69,8.35 IC3.7 28.27,8.56 28.18,8.66 | 30.04,10.56 30.04,14.27 30.84,15.07 U1.P$B1 30.98,16.23 | 37.31,16.42 36.61,15.72 36.61,15.69 U1.P$A22 36.36,15.69 36.36,15.72 35.85,16.23 30.98,16.23
DEC1  (via drill 0.21, 0.35)
  Top 0.127: v30.07,14.95 30.19,15.07 30.19,19.15 v29.6,19.73 | v28.6,19.13 28.09,19.65 C5.1
  Bottom 0.127: U1.P$C1 30.45,14.56 v30.07,14.95 | v29.6,19.73 29.2,19.73 v28.6,19.13
  other vias: 30.98,14.56
DEC3  (via drill 0.15, 0.2, 0.21)
  Top 0.127: v38.47,14.08 38.47,15.3 v38.5,15.33 | v41.7,16.23 41.88,16.41 C11.1 | U1.P$D23
  Bottom 0.127: v38.47,14.08 38.45,14.06 37.23,14.06 U1.P$D23 | v38.5,15.33 39.4,16.23 v41.7,16.23
  other vias: 36.98,14.31
DEC4_6  (via drill 0.21, 0.3)
  Top 0.127: v32.57,15.66 32.28,15.37 32.28,15.12 U1.P$B5 | v34.5,17.66 35.01,18.17 C15.1 | v37.48,14.55 37.48,14.1 U1.P$E24 | C16.1 37.48,19.12 37.48,19.25 37.74,19.5 38.18,19.5 38.31,19.37 38.31,18.8 37.23,17.72 35.51,17.72 35.07,18.17 C15.1 | v39.64,16.77 41.23,18.36 C10.1 | L3.2 34.43,20.39 34.43,18.8 35.01,18.23 C15.1
  Bottom 0.127: v34.5,17.66 34.09,17.25 34.08,17.25 33.94,17.1 | v32.57,15.66 32.57,15.73 33.79,16.95 33.94,17.1 | v37.48,14.55 37.34,14.69 36.54,14.69 36.1,15.13 | v39.64,16.77 38.05,16.77 36.41,15.13 36.1,15.13 | 36.1,15.13 35.31,15.13 34.98,15.46 34.98,16.35 34.23,17.1 33.94,17.1
DN  (via drill 0.3)
  Top 0.127: 23.67,27.79 23.7,27.82 23.7,28.96 J4.B7 | 23.67,27.79 23.45,27.57 23.07,27.57 22.81,27.82 22.81,28.96 J4.A7 | v27.96,27.57 27.96,25.79 D3.1 | v26.62,31.31 26.24,31.31 v25.8,30.87 | 23.67,27.79 v23.77,27.69
  Bottom 0.127: v27.96,27.57 27.96,28.2 28.4,28.65 28.4,30.49 27.58,31.31 v26.62,31.31 | v25.8,30.87 23.77,28.84 v23.77,27.69
DP  (via drill 0.3)
  Top 0.127: v22.31,28.01 22.31,28.96 J4.B6 | v23.26,28.01 23.26,28.96 J4.A6 | D3.3 27.64,23.88 27.07,24.45 v27.07,26.68
  Bottom 0.127: v22.31,28.01 v23.26,28.01 23.26,28.96 25.61,31.31 25.99,31.31 26.43,30.87 27.64,30.87 28.15,30.36 28.15,28.77 27.07,27.69 v27.07,26.68
EPD_3V3
  Top 0.3: Q1.3 13.88,11.01 13.98,11.01 | 13.98,11.01 13.56,11.43 12.2,11.43 11.6,12.03 11.6,15.23 11.12,15.72 J1.16 J1.15 11.29,16.22 12,16.93 12,21.83 12.5,22.33 13.4,22.33 13.65,22.58 EPD_C5.2 14.11,23.53 16,23.53 16.15,23.56 16.15,24.45 L5.2 | C1-EP-DR.2 16,9.01 16,10.83 15.83,11.01 13.98,11.01
GDR  (via drill 0.3)
  Top 0.127: R2_EP_DR.2 23.64,16.2 23.32,16.52 23.32,16.96 25.04,18.68 25.61,18.68 25.74,18.8 25.74,19.5 25.48,19.76 22.94,19.76 Q3.1 22.88,19.82 v22.24,20.45 | v9.92,22.3 10.3,22.68 10.62,22.68 J1.2
  Bottom 0.127: v9.92,22.3 9.92,21.85 9.48,21.41 9.48,21.03 10.05,20.45 v22.24,20.45
GND  (via drill 0.21, 0.3)
  Top 0.127: 32.47,14.17 32.72,14.42 32.72,15.06 U1.P$B7 | U1.P$F23 36.97,13.85 36.34,13.85 36.09,14.1 U1.P$74 | U1.P$83 32.47,11.75 32.47,12.9 U1.P$74 | U1.P$79 32.47,12.96 U1.P$74 | 32.47,14.17 U1.P$75 | 32.47,14.17 U1.P$74 | U1.P$88 33.67,10.55 33.67,11.69 U1.P$74 | U1.P$88 33.74,10.55 34.82,10.55 U1.P$89 34.88,10.55 36.02,10.55 U1.P$90 36.02,10.61 36.02,11.69 U1.P$86 | U1.P$84 33.67,11.75 U1.P$74 | U1.P$85 34.82,11.75 34.24,12.33 U1.P$74 | U1.P$80 33.67,12.96 U1.P$74 | U1.P$81 34.82,12.96 U1.P$74 | U1.P$76 33.61,14.1 33.48,14.1 33.04,13.66 U1.P$74 | U1.P$77 34.88,14.1 35.45,13.53 U1.P$74 | U1.P$82 36.02,12.96 35.51,13.47 U1.P$74 | U1.P$78 36.09,14.17 U1.P$74 | C6.2 26.81,13.09 28.4,13.09 C20.2 28.47,13.09 28.34,12.96 28.34,11.78 C19.2 28.1,11.37 29.08,11.37 v29.42,11.03 | IC3.9 27.32,8.39 27.77,8.39 IC3.8 27.26,7.83 v27.23,7.85 | v25.07,4.13 24.95,4.01 24.4,4.01 SW_ENT.1 | U1.P$88 33.61,10.55 32.47,10.55 U1.P$87 | 30.12,4.58 30.12,4.83 32.4,7.12 32.4,7.31 | 30.12,4.58 30.12,3.37 30.37,3.12 31.13,3.12 C29.1 | 32.4,7.31 32.4,7.5 C21.2 | 32.4,7.31 35.77,7.31 C7.2 35.98,7.07 35.98,4.52 SW_DN.1 | 32.4,7.31 C21.2 | C30.1 15.68,3.88 13.48,3.88 13.42,3.94 SW_UP.1 13.35,4.01 13.16,4.2 13.16,6.42 C38.1 13.23,6.42 14.18,6.42 14.94,7.18 16.91,7.18 18.45,5.64 C31.1 20.41,5.15 21.61,6.36 22.81,6.36 22.82,6.35 | 23.07,6.74 R_TYPE_SEL.1 | R3.1 | 30.12,4.58 26.77,4.58 25.86,5.5 | R3.1 24.34,6.61 24.74,6.61 25.86,5.5 | 25.86,5.5 25.84,5.48 25.83,5.47 v25.61,5.47 | C16.2 37.93,19.06 37.93,18.93 37.23,18.23 36.09,18.23 C15.2 36.09,18.29 36.09,19.63 34.78,20.93 | 28.62,23.41 28.72,23.5 28.72,24.26 28.21,24.77
  Top 0.127: 28.62,23.41 28.59,23.37 27.2,23.37 25.16,25.41 25.16,26.61 R2_USB.2 | 28.21,24.77 27.96,24.77 D3.2 28.21,24.77 | 28.21,24.77 29.99,26.55 29.99,29.6 C42.2 | 28.62,23.41 30.18,21.85 30.18,21.03 C14.2 30.24,20.96 34.75,20.96 34.78,20.93 | C22.2 38.94,9.21 38.94,10.48 39.01,10.55 C8.2 39.07,10.61 39.2,10.61 39.45,10.86 39.45,12.01 | 39.88,12.01 40.52,12.01 C3.2 41.66,12.12 42.37,12.83 42.37,12.96 C1.2 42.44,13.02 42.44,14.99 C2.2 42.44,15.06 42.44,15.82 | 39.88,12.01 39.45,12.01 | 39.45,12.01 39.2,12.01 C9.2 39.2,12.07 v39.2,12.64 39.2,14.26 X1.4 | 39.88,12.01 40.3,11.58 40.3,10.87 C4.2 | 42.44,15.82 42.44,16.77 C11.2 42.37,16.83 42.37,17.53 41.8,18.1 41.8,18.36 C10.2 41.74,18.42 41.74,18.55 40.72,19.56 | 42.44,15.82 40.44,15.82 X1.2 | J2.3 37.61,27.18 37.61,28.39 J2.5 | 40.72,19.56 39.77,18.61 39.77,18.04 C12.2 | 40.72,19.56 40.72,19.76 C13.2 | 40.72,19.56 C13.2 | J2.3 37.67,27.18 37.93,27.18 39.01,26.1 40.09,26.1 40.98,25.22 40.98,20.01 40.78,19.82 C13.2 | 35.74,26.14 36.09,26.49 36.91,26.49 37.55,27.12 J2.3 | 35.74,26.14 35.7,26.1 35.7,25.6 35.89,25.41 35.89,23.95 34.82,22.87 34.82,20.96 34.78,20.93 | 7.03,31.72 7.13,31.82 C23.1 | 7.03,31.72 6.24,30.93 C27.1 6.3,30.93 7.7,29.53 U3.1 7.7,29.47 8.78,29.47 8.81,29.44 | 7.03,31.72 5.73,33.03 TP_BAT_GND.TP | 5.54,27.76 6.43,27.76 6.94,27.25 | 5.54,27.76 5.22,27.76 IC2.B3 | 6.94,27.25 7.26,26.93 C34.1 | 6.94,27.25 7.64,27.95 U3.4 7.7,28.01 8.02,28.01 8.72,28.71 U3.9 | 8.81,29.44 8.72,29.34 8.72,28.77 U3.9 | 8.81,29.44 9.8,30.42 9.8,30.93 C24.1 | U3.6 9.61,28.52 9.03,28.52 8.78,28.77 U3.9 | 5.54,27.76 5.54,28.84 3.95,30.42 3.51,30.42 3.38,30.3 3.38,30.23 C32.1 3.19,29.98 3.19,28.77 4.14,27.82 IC2.B1 4.14,27.76 3.83,27.44 3.83,27.12 5.22,25.72 6.24,25.72 7.95,24.01 J1.MP1 8.02,23.95 8.02,23.44
  Top 0.127: 7.22,4.8 6.68,4.26 C37.1 | 7.22,4.8 8.02,5.59 9.42,5.59 10.43,6.61 10.43,6.67 IC1.D2 | 5.89,6.07 6.37,6.55 6.37,7.94 C39.2 6.43,8.01 7.95,9.53 7.95,10.86 J1.MP2 8.02,10.93 8.02,23.44 | 5.89,6.07 5.61,5.78 5.54,5.78 5.35,5.59 R9.1 5.29,5.53 3.51,3.75 3.51,2.61 TP_GND.TP | v7.07,4.96 7.22,4.8 | v5.99,6.04 5.92,6.04 5.89,6.07 | 28.12,18.58 28.28,18.42 C17.1 | 28.12,18.58 27.64,19.06 27.64,19.82 C5.2 | 24.53,16.77 25.1,16.77 26.69,18.36 C18.1 26.69,18.29 27.07,17.91 27.45,17.91 28.12,18.58 | 24.53,16.77 23.7,16.77 R2_EP_DR.1 | 24.53,16.77 SJ1.1 24.46,10.99 24.46,10.8 23.07,9.4 17.29,9.4 | 17.29,9.4 17.29,11.18 D4.1 17.23,11.18 16.15,11.18 14.88,12.45 14.43,12.45 EPD_C12.1 14.37,12.52 14.37,13.02 13.35,14.04 EPD_C11.1 13.35,14.1 13.35,15.56 EPD_C10.1 13.29,15.63 13.29,16.96 EPD_C9.1 13.23,17.02 13.23,18.42 EPD_C8.1 13.16,18.49 13.16,19.82 EPD_C7.1 13.23,19.82 13.23,21.53 EPD_C6.1 13.16,21.53 v12.53,21.53 | 17.29,9.4 17.29,8.83 C1-EP-DR.1 | J4.A1_B12 26.24,29.03 26.81,29.03 27.32,29.53 J4.SH3 27.39,29.6 27.39,31.06 28.69,32.36 | 28.69,32.36 27.39,33.66 J4.SH1 | 28.69,32.36 28.72,32.33 29.35,32.33 C43.1 29.93,32.84 30.75,32.84 31.96,31.63 31.96,28.07 33.86,26.17 35.7,26.17 35.74,26.14 | J1.17 10.62,15.25 10.3,15.25 10.05,15.5 10.05,19.44 10.3,19.69 10.62,19.69 J1.8 10.69,19.76 10.94,19.76 11.45,20.26 v11.45,21.28 | 14.62,25.03 14.62,25.72 14.18,26.17 EPD_C1.1 14.18,26.23 v14.18,28.33 | 14.62,25.03 14.62,24.14 14.43,23.95 13.86,23.95 13.16,23.25 13.16,23.12 EPD_C5.1 | 14.62,25.03 13.86,25.03 13.35,24.52 13.16,24.52 EPD_C2.1 | C25.2 15.64,29.85 16.91,29.85 C33.2 16.97,29.85 18.37,29.85 18.62,29.6 J4.SH4 18.69,29.53 19.19,29.03 19.77,29.03 J4.A12_B1
  Top 0.127: IC9.C3 12.78,32.39 13.1,32.39 IC9.C2 13.16,32.33 13.48,32.33 IC9.C1 13.54,32.33 13.54,32.01 IC9.B1 13.61,31.95 13.67,31.95 13.92,31.69 13.92,31.44 v13.48,30.99 | v21.67,28.01 22.31,27.37 22.31,27.06 R1_USB.1 | v8.4,23.44 8.02,23.44 | v30.1,9.93 28.8,9.93 v28.64,10.09 | v32.5,8.13 32.5,7.56 C21.2 | R3.1 24.09,6.62 23.7,6.23 22.94,6.23 22.82,6.35 | R_TYPE_SEL.1 23.1,6.72 | R_TYPE_SEL.1 23.13,6.66 22.82,6.35
  Bottom 0.127: U1.P$87 32.43,10.19 31.02,8.77 | v25.07,4.13 25.02,4.18 25.02,4.88 v25.61,5.47 27.23,7.09 v27.23,7.85 | v39.2,12.64 38.75,13.09 38.37,13.09 38.24,12.96 36.09,12.96 U1.P$82 | v5.99,6.04 v7.07,4.96 | 14.18,30.99 17.23,30.99 17.26,30.96 | 14.18,30.99 v13.48,30.99 | 17.26,30.96 18.62,29.6 J4.SH4 18.69,29.53 20.21,28.01 v21.67,28.01 22.43,27.25 23.96,27.25 26.24,29.53 27.32,29.53 J4.SH3 | 14.18,30.99 v14.18,28.33 14.18,24.52 12.37,22.71 | v11.45,21.28 11.45,21.79 11.86,22.2 | 12.37,22.71 11.86,22.2 | 17.26,30.96 18.62,32.33 18.62,33.66 J4.SH2 | 11.86,22.2 v12.53,21.53 | v8.4,23.44 11.64,23.44 12.37,22.71 | v29.42,11.03 28.64,10.25 v28.64,10.09 | v30.1,9.93 30.19,9.93 31.02,9.1 31.02,8.77 | v32.5,8.13 32.3,8.33 31.2,8.33 31.02,8.52 31.02,8.77
IMU_INT1  (via drill 0.21)
  Top 0.127: U1.P$N1 30.9,12.06 30.53,12.06 v30.5,12.03 | v29.53,11.58 29.36,11.58 28.92,12.01 v28.79,12.01 | v26.3,9.93 25.66,9.29 v25.38,9.29 | v23.5,7.53 23.5,6.8 v23.59,6.71 | v23.91,4.87 24.97,4.87 25.7,4.14 v25.7,2.73 | v28.2,3.23 v27.5,3.93 | v27.72,7.31 27.73,7.32 IC3.5
  Bottom 0.127: v30.5,12.03 29.99,12.03 v29.53,11.58 | v28.79,12.01 26.79,12.01 26.3,11.53 v26.3,9.93 | v25.38,9.29 23.62,7.53 v23.5,7.53 | v23.59,6.71 23.59,5.04 23.76,4.87 v23.91,4.87 | v25.7,2.73 27.7,2.73 v28.2,3.23 | v27.5,3.93 27.5,5.33 27.68,5.51 27.68,7.28 v27.72,7.31
IMU_INT2  (via drill 0.2, 0.21)
  Top 0.127: IC3.6 v27.78,7.83
  Bottom 0.127: v27.78,7.83 27.78,8.2 31.38,11.81 U1.P$P2
  other vias: 31.48,11.81
LX1  (via drill 0.3)
  Top 0.127: IC9.B2 13.1,31.95 12.78,31.95 IC9.B3 12.72,32.01 12.08,32.01 v11.83,32.26 | v13.1,34.11 15.58,34.11 16.27,33.41 L7.1
  Bottom 0.127: v11.83,32.26 11.83,32.84 v13.1,34.11
LX2  (via drill 0.3)
  Top 0.127: IC9.D2 13.1,32.77 12.78,32.77 IC9.D3 12.72,32.71 12.34,32.71 v12.27,32.65 | v15.32,32.33 16.27,31.38 L7.2
  Bottom 0.127: v12.27,32.65 13.1,32.65 13.86,33.41 14.24,33.41 v15.32,32.33
N$1
  Top 0.127: U1.P$AC5 32.14,9.43 31.04,9.43 29.29,7.68 29.29,6.23 28.34,5.28 27.07,5.28 24.7,7.64 24.7,9.48 25.35,10.13 25.35,12.71 25.29,12.77 25.29,13.47 25.48,13.66 28.97,13.66 29.48,13.15 C20.1
N$2
  Top 0.127: L2.2 32.91,18.04 32.91,19.95 33.36,20.39 L3.1
N$3  (via drill 0.21)
  Top 0.127: L2.1 31.86,16.87 v31.9,16.83
  Bottom 0.127: v31.9,16.83 31.89,16.82 31.89,15.22 U1.P$B3
  other vias: 31.73,15.06
N$4  (via drill 0.2)
  Top 0.127: v36.97,15.06 U1.P$B24 | v39.74,13.43 40.42,14.11 X1.1 40.44,14.26 41.67,13.02 41.86,13.02 C1.1
  Bottom 0.127: v36.97,15.06 38.11,15.06 v39.74,13.43
N$5  (via drill 0.3)
  Top 0.127: v12.84,11.94 13.35,12.45 EPD_C12.2 | v11.77,11.06 11.19,11.06 10.69,11.56 10.69,11.69 J1.24
  Bottom 0.127: v12.84,11.94 12.65,11.94 v11.77,11.06
N$6  (via drill 0.21, 0.3)
  Top 0.127: v37.48,15.56 37.04,15.56 U1.P$A23 | v38.37,16.33 38.63,16.33 38.94,16.01 X1.3 39.16,15.73 39.83,15.06 41.93,15.06 C2.1
  Bottom 0.127: v37.48,15.56 37.61,15.56 v38.37,16.33
N$7  (via drill 0.3)
  Top 0.127: v14.05,32.96 13.92,33.09 13.61,33.09 IC9.E1 | v12.46,29.92 12.46,29.66 12.27,29.47 R2.2
  Bottom 0.127: v14.05,32.96 14.05,32.2 12.46,30.61 v12.46,29.92
N$8
  Top 0.127: IC9.D1 13.61,32.71 13.67,32.71 14.18,32.2 14.18,31.06 13.48,30.36 12.21,30.36 11.32,29.47 R4.2
N$9  (via drill 0.21, 0.3)
  Top 0.127: v8.02,6.67 10.05,6.67 IC1.D1 | v5.86,6.67 5.35,6.17 R9.2
  Bottom 0.127: v5.86,6.67 v8.02,6.67
N$10  (via drill 0.21)
  Top 0.127: v37.9,17.73 38.7,18.53 v38.7,18.63 | v39.5,19.73 39.54,19.77 C13.1
  Bottom 0.127: U1.P$A18 35.73,15.56 v37.9,17.73 | v38.7,18.63 39.5,19.43 v39.5,19.73
  other vias: 35.48,15.56
N$11  (via drill 0.21, 0.3)
  Top 0.127: v37.04,12.33 37.29,12.07 U1.P$N24 | v38.56,12.64 38.56,12.14 38.63,12.07 C9.1
  Bottom 0.127: v37.04,12.33 38.24,12.33 v38.56,12.64
N$12  (via drill 0.21, 0.3)
  Top 0.127: v24.86,5.89 24.71,6.04 24.34,6.04 R3.2 | v26.24,6.74 26.75,6.74 IC3.1
  Bottom 0.127: v24.86,5.89 25.39,5.89 v26.24,6.74
N$13
  Top 0.127: IC2.A2 4.65,28.33 4.65,28.45 3.76,29.34 3.76,29.98 C32.2
N$14  (via drill 0.21, 0.3)
  Top 0.127: v37.48,13.53 37.29,13.34 37.04,13.34 U1.P$H23 | C3.1 40.6,12.65 v39.92,12.65 | v40.8,11.57 40.8,10.04 L1.1
  Bottom 0.127: v37.48,13.53 39.04,13.53 v39.92,12.65 40.8,11.77 v40.8,11.57
N$15  (via drill 0.21, 0.3)
  Top 0.127: v22.62,7.56 22.62,6.8 R_TYPE_SEL.2 | v22.62,9.85 22.62,10.67 22.94,10.99 SJ1.2 23.32,11.37 23.32,14.42 23.26,14.48 23.2,14.48 23,14.68 R1_EP_DR.1
  Bottom 0.127: v22.62,9.85 v22.62,7.56
N$16  (via drill 0.3)
  Top 0.127: v14.43,16.26 14.3,16.14 14.3,15.63 EPD_C10.2 | v9.92,12.64 10.56,12.64 10.62,12.71 J1.22
  Bottom 0.127: v14.43,16.26 14.24,16.26 10.62,12.64 v9.92,12.64
N$17  (via drill 0.3)
  Top 0.127: v13.67,17.72 14.11,18.17 14.11,18.42 EPD_C8.2 | v9.92,13.98 10.05,13.98 10.3,13.72 10.62,13.72 J1.20
  Bottom 0.127: v9.92,13.98 v13.67,17.72
N$18  (via drill 0.3)
  Top 0.127: v14.11,19.18 14.11,19.82 EPD_C7.2 | v9.92,14.99 9.92,14.61 10.3,14.23 10.62,14.23 J1.19
  Bottom 0.127: v9.92,14.99 v14.11,19.18
N$19  (via drill 0.3)
  Top 0.127: v14.88,20.01 14.3,20.58 14.3,21.53 EPD_C6.2 | v11.38,11.5 11.38,11.75 11.19,11.94 11.19,14.48 11,14.68 10.69,14.68 J1.18
  Bottom 0.127: v14.88,20.01 14.88,14.99 v11.38,11.5
N$20  (via drill 0.3)
  Top 0.127: v18.62,7.56 18.69,7.56 19.13,7.12 C2-EP-DR.1 | v19.7,19.12 20.59,19.12 20.66,19.18 D5.2 | Q3.3 24.97,19.18 20.72,19.18 D5.2 | L5.1 20.72,24.45 20.72,19.25 D5.2
  Bottom 0.127: v18.62,7.56 18.62,18.04 v19.7,19.12
N$21  (via drill 0.3)
  Top 0.127: v20.78,7.56 20.34,7.12 20.21,7.12 C2-EP-DR.2 | v20.78,10.42 20.78,11.18 D4.2 20.85,11.25 20.85,15.18 D2.1
  Bottom 0.127: v20.78,10.42 v20.78,7.56
N$22  (via drill 0.3)
  Top 0.127: v24.53,27.18 25.1,27.18 R2_USB.1 | v19.26,28.14 20.91,28.14 21.23,28.45 21.23,28.96 J4.B5
  Bottom 0.127: v24.53,27.18 24.27,27.18 24.08,26.99 20.4,26.99 v19.26,28.14
N$26
  Top 0.127: EPD_C2.2 14.11,24.45 13.99,24.45 13.03,23.5 12.91,23.5 11.83,22.42 11.83,22.17 11.38,21.72 10.69,21.72 J1.4
N$27  (via drill 0.3)
  Top 0.127: v11.38,22.99 11.38,23.56 13.1,25.28 13.1,26.17 EPD_C1.2 | v9.92,21.22 10.62,21.22 J1.5
  Bottom 0.127: v11.38,22.99 10.18,21.79 10.18,21.47 v9.92,21.22
N$29
  Top 0.127: R1_USB.2 22.37,26.49 23.2,26.49 24.21,27.5 24.21,28.96 J4.A5
OUT+  (via drill 0.3)
  Top 0.127: v4.97,28.77 5.16,28.58 5.16,28.33 IC2.A3 | v2.75,28.52 1.86,28.52 1.48,28.9 TP_OP.TP
  Bottom 0.127: v4.97,28.77 3,28.77 v2.75,28.52
OUT-  (via drill 0.3)
  Top 0.127: v5.61,26.99 5.35,27.25 5.22,27.25 IC2.C3 | v2.56,26.99 1.29,25.72 TP_ON.TP
  Bottom 0.127: v2.56,26.99 v5.61,26.99
P0.00/XL1  (via drill 0.21, 0.3)
  Top 0.127: v31.51,15.5 31.36,15.35 31.36,14.47 U1.P$D2 | v29.48,15.5 28.78,15.5 28.66,15.63 X2.1 28.66,15.69 28.78,15.82 28.78,18.36 C17.2
  Bottom 0.127: v29.48,15.5 v31.51,15.5
P0.01/XL2  (via drill 0.21)
  Top 0.127: 28.3,14.55 27.2,14.55 26.12,15.63 X2.2 | 28.3,14.55 29.14,14.55 29.93,15.34 29.93,18.61 28.28,20.26 27.39,20.26 27.2,20.07 27.2,18.42 C18.2 | U1.P$F2 31.22,13.81 30.9,14.13 v30.6,14.13 | v28.6,14.13 28.3,14.43 28.3,14.55
  Bottom 0.127: v30.6,14.13 v28.6,14.13
P0.13/1.5D  (via drill 0.3)
  Top 0.127: R5.1 15.68,3.04 C30.2 15.62,3.25 15.31,3.25 v15.12,3.44 | v11.68,3.18 11.38,3.18 10.62,3.94 SW_UP.2
  Bottom 0.127: v15.12,3.44 14.92,3.64 12.14,3.64 v11.68,3.18
P0.14/1.5D  (via drill 0.3)
  Top 0.127: 19.51,3.94 19.51,2.74 R8.1 | C31.2 19.51,4.87 19.51,3.94 | v19.77,3.94 19.51,3.94 | v20.85,3.9 21.5,3.9 21.54,3.94 SW_ENT.2
  Bottom 0.127: v20.85,3.9 20.81,3.94 v19.77,3.94
P1.01/1.6C  (via drill 0.3)
  Top 0.127: v16.34,5.15 16.4,5.21 16.78,5.21 R_PWR_EPD.1 | v13.8,8.83 12.97,8.83 Q1.1
  Bottom 0.127: v16.34,5.15 16.34,6.29 v13.8,8.83
P1.02/1.6C  (via drill 0.3)
  Top 0.127: v30.56,2.67 30.75,2.48 31.07,2.48 R7.1 | v30.56,3.56 31.01,3.56 31.13,3.69 C29.2 31.2,3.75 32.4,3.75 32.59,3.94 SW_DN.2
  Bottom 0.127: v30.56,3.56 v30.56,2.67
PMIC_INT  (via drill 0.21, 0.35)
  Top 0.127: v31,9.93 30.8,9.93 v29.9,9.03 | v8.2,7.33 8.2,8.23 8.5,8.53 9.48,8.53 IC1.A1 | v30.2,7.93 30.2,6.83 v30,6.63
  Bottom 0.127: U1.P$T2 31,10.83 v31,9.93 | v30,6.63 30,5.73 27.6,3.33 20.49,3.33 19.79,2.63 15.3,2.63 14.6,3.33 13.1,3.33 12.4,2.63 11.5,2.63 8.5,5.63 8.5,7.03 v8.2,7.33 | v29.9,9.03 30.2,8.73 v30.2,7.93
  other vias: 31.48,11.31
PREVGH  (via drill 0.3)
  Top 0.127: D5.1 17.16,19.18 15,17.02 14.3,17.02 EPD_C9.2 14.3,16.96 v13.8,16.45 | v9.92,13.28 10.62,13.28 J1.21
  Bottom 0.127: v9.92,13.28 10.62,13.28 v13.8,16.45
PREVGL  (via drill 0.3)
  Top 0.127: D2.2 17.29,15.18 16.21,14.1 14.37,14.1 EPD_C11.2 14.37,14.17 v13.86,14.68 | v9.92,12.01 10.11,12.2 10.62,12.2 J1.23
  Bottom 0.127: v9.92,12.01 11.19,12.01 v13.86,14.68
RESE  (via drill 0.3)
  Top 0.127: 22.59,18.14 22.88,18.42 Q3.2 | 22.59,18.14 22.56,18.1 22.56,14.48 22.69,14.36 22.75,14.36 22.94,14.17 R1_EP_DR.2 | v11.38,22.36 11.26,22.23 10.69,22.23 J1.3 | v17.29,20.9 20.02,18.17 22.56,18.17 22.59,18.14
  Bottom 0.127: v11.38,22.36 11.38,22.1 11,21.72 11,21.09 11.26,20.83 17.23,20.83 v17.29,20.9
RESET  (via drill 0.21, 0.35)
  Top 0.127: 44.34,15.31 45.55,16.52 45.55,21.79 44.78,22.55 44.34,22.55 41.23,25.66 41.23,28.14 38.88,30.49 37.61,30.49 37.1,29.98 37.1,29.72 36.34,28.96 36.34,28.45 J2.6 | 44.34,15.31 TP_RESET.TP | v42.9,14.23 43.9,14.23 44.34,14.67 44.34,15.31
  Bottom 0.127: U1.P$AC13 36,9.56 37.37,10.93 40.8,10.93 42.9,13.03 v42.9,14.23
  other vias: 34.23,9.56
RF
  Top 0.127: C4.1 39.83,10.74 39.45,10.36 39.45,9.21 C22.1 39.45,9.09 40.09,8.45 41.1,8.45 L1.2 41.17,8.45 42.69,9.98 44.21,9.98 ANT1.1
SCL/1.4C  (via drill 0.3)
  Top 0.127: v7.07,25.85 6.94,25.98 5.35,25.98 4.21,27.12 4.21,27.25 IC2.C1 | v8.84,27.63 10.11,27.63 10.24,27.76 10.24,28.71 9.99,28.96 9.67,28.96 U3.7
  Bottom 0.127: v8.84,27.63 v7.07,25.85
SCL/2.4C  (via drill 0.21, 0.3)
  Top 0.127: v11.26,27.95 11.26,28.84 R4.1 | v13.1,29.92 13.1,29.53 12.91,29.34 R17.2 | v14.18,9.59 9.77,9.59 v9.3,9.13 | v25.8,8.39 25.8,8.13 26.56,7.37 26.69,7.37 IC3.12 | IC1.B1 10.05,7.56 9.99,7.56 9.69,7.86 v9.02,7.86 | v41.67,26.87 44.28,24.26 TP_SCL.TP | v27.7,9.33 26.7,9.33 v26.3,8.93
  Bottom 0.127: v11.26,27.95 11.26,28.52 11.73,28.99 | 11.73,28.99 12.21,29.47 12.65,29.47 v13.1,29.92 | v14.18,9.59 15.96,9.59 18.4,7.15 | 18.4,7.15 18.43,7.12 24.53,7.12 v25.8,8.39 | 11.73,28.99 12.15,28.58 12.15,27.82 7.95,23.63 7.95,12.07 15.32,4.71 16.53,4.71 18.37,6.55 18.37,7.12 18.4,7.15 | v41.67,26.87 41.67,27.69 40.09,29.28 38.69,29.28 37.48,28.07 36.78,28.07 35.89,27.18 35.89,22.55 25.8,12.45 v25.8,8.39 | U1.P$M2 31.4,12.31 28.42,9.33 v27.7,9.33 | v26.3,8.93 25.8,8.43 v25.8,8.39 | v9.3,9.13 9,8.83 9,7.87 v9.02,7.86
  other vias: 31.48,12.31
SDA/1.4C  (via drill 0.21, 0.35)
  Top 0.127: v10.1,30.03 10.1,29.94 U3.8
  Bottom 0.127: IC2.B2 7.84,27.77 v10.1,30.03
  other vias: 4.68,27.77
SDA/2.4C  (via drill 0.21, 0.3)
  Top 0.127: R18.2 14.18,28.9 12.27,28.9 R2.1 12.21,28.84 v11.7,28.33 | v27.26,5.72 27.26,6.74 IC3.2 | IC1.C1 10.05,7.12 v9.21,7.12 | U1.P$L1 v30.51,13.04 | v42.31,18.23 44.28,18.23 TP_SDA.TP
  Bottom 0.127: 12.25,6.94 12.71,6.94 15.2,4.44 24.4,4.44 | 12.25,6.94 | 12.25,6.94 12.17,6.94 11.62,7.49 9.16,7.49 9,7.33 | v27.26,5.72 25.29,3.75 24.91,3.75 24.72,3.94 24.4,3.94 24.4,4.44 | 24.4,4.44 24.4,6.36 26.84,8.8 26.84,9.77 26.9,9.83 27.13,9.83 30.34,13.04 v30.51,13.04 32.15,14.67 32.15,15.91 34.46,18.23 v42.31,18.23 | v11.7,28.33 11.7,27.76 7.7,23.76 7.7,8.62 9,7.33 | 9,7.33 v9.21,7.12
SWDCLK  (via drill 0.21, 0.3)
  Top 0.127: v37.8,9.21 37.8,9.66 37.55,9.91 37.55,10.04 U1.P$AA24 | v43.77,25.98 43.77,26.87 44.15,27.25 TP_SWDCLK.TP | v36.97,27.63 36.53,27.18 36.34,27.18 J2.4
  Bottom 0.127: v37.8,9.21 39.96,9.21 43.77,13.02 v43.77,25.98 43.64,26.1 39.01,26.1 37.48,27.63 v36.97,27.63
SWDIO  (via drill 0.21, 0.3)
  Top 0.127: v37.04,9.79 37.23,9.59 37.48,9.59 U1.P$AC24 | v43.32,20.33 44.28,21.28 TP_SWDIO.TP | v38.31,26.04 37.86,26.49 37.36,26.49 36.78,25.91 36.34,25.91 J2.2
  Bottom 0.127: v37.04,9.79 40.15,9.79 43.42,13.06 43.42,20.23 v43.32,20.33 41.61,20.33 37.93,24.01 37.93,25.15 38.31,25.53 v38.31,26.04
SWO  (via drill 0.21, 0.3)
  Top 0.127: v36.47,8.58 36.47,9.02 U1.P$AD22 | v43.39,11.5 44.34,12.45 TP_SWO.TP
  Bottom 0.127: v36.47,8.58 40.47,8.58 v43.39,11.5
VBAT/1.2A
  Top 0.3: 7.52,28.83 U3.2 7.45,28.9 7.36,28.81 | TP_VBAT.TP 4.21,31.53 5.38,30.36 C27.2 6.21,29.95 7.36,28.81 | U3.3 7.36,28.81
VBAT/2.5C
  Top 0.3: IC1.C2 10.9,7.13 11.2,6.83 11.2,6.13 10.3,5.23 8.2,5.23 7.25,4.28 C37.2
VBUS/1.5D
  Top 0.3: 30.31,30.52 C42.1 29.85,30.06 29.7,30.06 26.88,27.23 25.7,27.23 25.61,27.33 25.61,27.46 25.4,27.66 J4.A4_B9 25.3,29.09 25.3,29.63 25,29.93 21.03,29.93 20.6,29.5 J4.A9_B4 | 30.31,30.52 30.41,30.63 C43.2 | D3.5 31.2,24.83 31.6,25.23 31.6,29.23 30.31,30.52
VBUS/2.6D
  Top 0.3: IC1.A2 10.98,7.93 11.08,8.03 11.8,8.03 12.27,7.57 12.6,7.57 | 12.6,7.57 14.96,7.57 15.48,8.09 23.75,8.09 26.9,4.93 29.7,4.93 31.46,6.69 C21.1 31.47,9.04 U1.P$AD2 | C38.2 12.56,7.52 12.6,7.57
VREG
  Top 0.15: IC1.B2 11.4,7.53 11.41,7.53
  Top 0.3: 10.7,31.97 C24.2 9.7,31.83 C23.2 | 10.7,31.97 11.04,31.97 11.46,31.55 IC9.A3 IC9.A2 IC9.A1 | 11.4,7.53 11.7,7.23 11.7,5.93 10.56,4.79 9.54,4.79 7.14,2.39 | 7.14,2.39 TP_VREG.TP | 10.7,31.97 10.7,30.03 10.71,30.03 10.71,27.16 9.4,25.86 9.4,10.08 7.39,8.07 C39.1 7.5,7.86 7.5,6.13 6,4.63 6,3.53 7.14,2.39